# Altium PCB 555振荡器_qft.PCBDOC
Units mm, origin at the board's own origin, x right, y up, seen from the top; angles counter-clockwise.
Board outline 152.4 x 101.6 mm, 2 copper layers (Top Layer, Bottom Layer); 6 components, 6 nets, 24 pads, 1 vias.
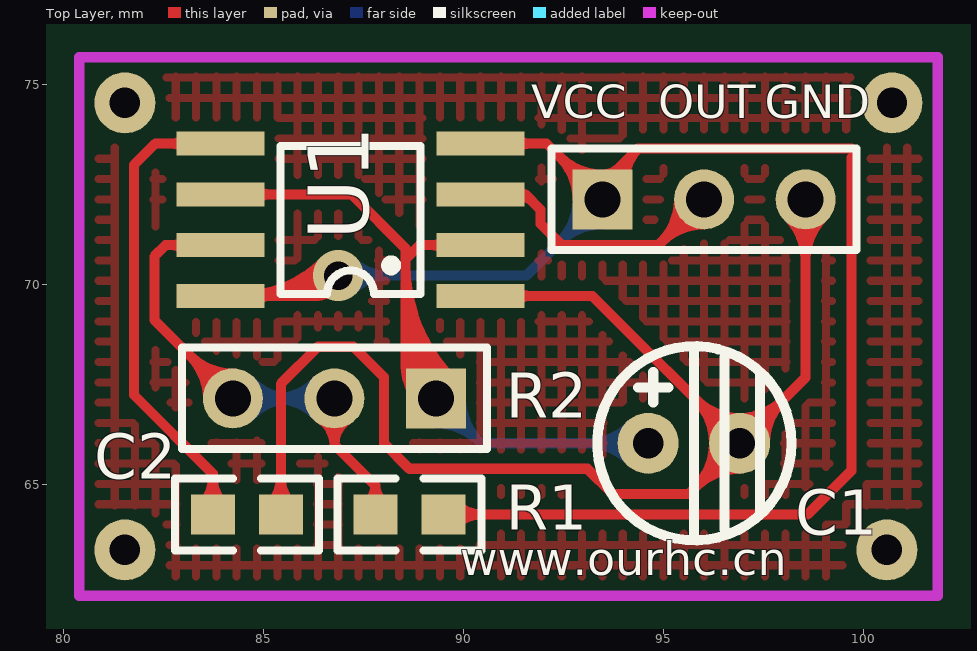
[diagram p0: Top Layer view]
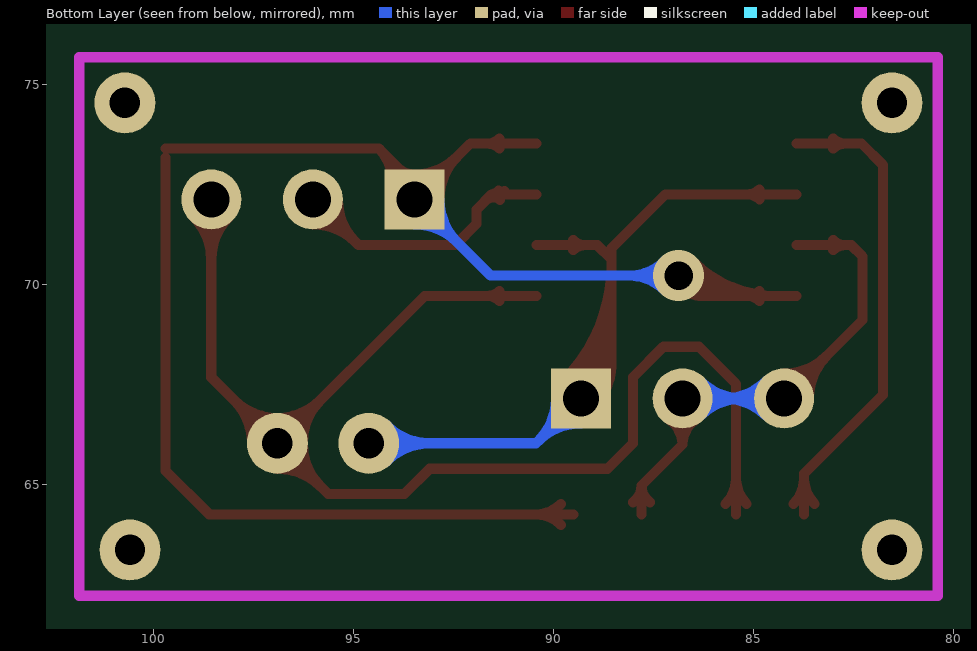
[diagram p1: Bottom Layer view, seen from below]

## Layer stack, top to bottom
Top Layer: signal copper 0.0356
Dielectric: dielectric 0.32, FR-4, Dk 4.8
Bottom Layer: signal copper 0.0356

## Board outline
25.4,25.4 177.8,25.4 177.8,127 25.4,127

## Design rules (kind name [scope] priority, off if disabled: settings)
Clearance [All] p1: gap=0.254
ComponentClearance [All] p1: gap=0.254 collisioncheckmode=3 verticalgap=0.254
PolygonConnect [All] p1: connectstyle=Relief reliefconductorwidth=0.254 reliefentries=4 polygonreliefangle="90 Angle"
RoutingVias [All] p1: holewidth=0.711 width=1.27 viastyle="Through Hole" minholewidth=0.711 minwidth=1.27 maxholewidth=0.711 maxwidth=1.27
SolderMaskExpansion [All] p1: expansion=0.102
TestPointUsage [All] p1: valid=0 allowmultiple=FALSE
Testpoint [All] p1: side=15 testpointundercomponent=TRUE minsize=1.016 maxsize=2.54 preferedsize=1.524 minholesize=0 maxholesize=1.016 preferedholesize=0.813 testpointgrid=0.025 style=1023 order=0-112345678
Width [All] p1: maxlimit=0.254 minlimit=0.254 preferedwidth=0.254
17 further rules are at their usual default settings.

## Classes and differential pairs
component class 555振荡器: C1

## Components (designator, comment, footprint, x,y, rotation, side; value= is the part's Value field where it differs from the comment)
C1 "" C-DJ-4 97.028,63.5 r0 top
C2 "C2" C1608-0603 84.582,64.262 r0 top
JP1 "" HDR1X3 93.472,72.136 r0 top
R1 "" C1608-0603 88.646,64.262 r0 top
R2 "" HDR-3 83.058,68.326 r180 top
U1 "NE555D" CDFP-8 90.932,74.168 r90 top

## Footprints (in the part's own frame and the unit in brackets; to place one, negate y for a bottom-side part, rotate by r counter-clockwise, add the part's x,y. Pads: shape width x height; smd on the part's side, far side on the other; paste and mask are expansions set on the pad)
C1608-0603 [mm] "Chip Resistor; Body 1.6 x 0.8 mm (LxW typ)"
  rect 1.1x1 smd: 1(-0.85,0) 2(0.85,0)
  silkscreen extent -1.8,-0.9 1.8,0.9
C-DJ-4 [mil]
  round 60 hole 30: 1(-95,100) 2(-5,100)
  silkscreen extent -145,5 46,195
CDFP-8 [mm]
  rect 0.6x2.2 smd: 1(-4.445,0.508) 2(-3.175,0.508) 3(-1.905,0.508) 4(-0.635,0.508) 5(-0.635,7.008) 6(-1.905,7.008) 7(-3.175,7.008) 8(-4.445,7.008)
  silkscreen extent -4.39,2.01 -0.69,5.51
HDR1X3 [mm] "Connector; Header; 3 Position"
  rect 1.5x1.5 hole 0.9: 1(0,0)
  round 1.5 hole 0.9: 2(2.54,0) 3(5.08,0)
  silkscreen extent -1.27,-1.27 6.35,1.27
HDR-3 [mm]
  rect 1.5x1.5 hole 0.9: 1(-6.253,1.165)
  round 1.5 hole 0.9: 2(-3.713,1.165) 3(-1.173,1.165)
  silkscreen extent -7.52,-0.11 0.1,2.43

## Part data
C1: library part "Cap Pol1", "Polarized Capacitor (Radial)"
C2: library part "Cap Semi", "Capacitor (Semiconductor SIM Model)"
JP1: library part "Header 3", "Header, 3-Pin"
R1: library part Res3, "Resistor"
R2: library part RPot, "Potentiometer"
U1: "Precision Timer"

## Free pads (board coordinates)
  round 1.524 hole 0.762: 0(100.711,74.549) 1(81.534,74.549) 2(81.534,63.373) 3(100.584,63.373)

## Via types
v1: diameter 1.27, hole 0.711, Top Layer to Bottom Layer, 1 vias

## Nets (pads, with @x,y where several pads share a name; then routed paths per layer and width w, separated by ;. In a path a pad name is that pad's centre, name@x,y a point inside that pad or via, vN(x,y) a via of type N, cw(c..) or ccw(c..) an arc to the next point about the centre after c; other vN are vias at no path point)
GND: C1.2 C2.2 JP1.3 U1.1 | length 50.3
  Top Layer w0.254: C2.2@85.168,64.526 ccw(c84.531,65.162) 85.432,65.162 ccw(c86.332,65.162) C2.2@85.696,64.526 ; C2.2 85.432,67.525 86.36,68.453 87.249,68.453 88.011,67.691 88.011,66.04 88.646,65.405 93.091,65.405 93.726,64.77 95.631,64.77 C1.2 ; U1.1 93.218,69.723 C1.2 ; U1.1@91.346,69.601 cw(c91.642,69.305) 91.642,69.723 cw(c91.642,70.141) U1.1@91.346,69.845 ; C1.2@96.901,65.405 ccw(c96.901,63.872) 95.817,64.956 ccw(c94.733,66.04) 96.266,66.04 ccw(c94.733,66.04) 95.817,67.124 ccw(c96.901,68.208) 96.901,66.675 ccw(c96.901,68.208) 97.985,67.124 ccw(c99.069,66.04) C1.2@97.536,66.04 ; C1.2@96.901,65.659 ccw(c96.901,64.739) 96.251,65.39 ccw(c95.6,66.04) 96.52,66.04 ccw(c95.6,66.04) 96.251,66.69 ccw(c96.901,67.341) 96.901,66.421 ccw(c96.901,67.341) 97.551,66.69 ccw(c98.202,66.04) C1.2@97.282,66.04 ; JP1.3@98.111,71.695 cw(c97.048,70.632) 98.552,70.632 cw(c100.056,70.632) JP1.3@98.993,71.695 ; JP1.3@98.291,71.875 cw(c97.661,71.245) 98.552,71.245 cw(c99.443,71.245) JP1.3@98.813,71.875 ; JP1.3 98.552,67.691 C1.2
NetC1_1: C1.1 R2.1 U1.2 U1.6 | length 38.7
  Top Layer w0.254: U1.6 87.198,72.263 88.544,70.917 88.544,70.637 ; U1.6@84.846,72.141 cw(c85.142,71.845) 85.142,72.263 cw(c85.142,72.681) U1.6@84.846,72.385 ; 88.544,68.063 ccw(c90.213,68.063) R2.1@89.033,66.883 ; 88.544,68.676 ccw(c90.826,68.676) R2.1@89.213,67.063 ; 88.544,69.289 ccw(c91.439,69.289) R2.1@89.392,67.242 ; 88.544,69.903 ccw(c92.053,69.903) R2.1@89.572,67.422 ; 88.544,70.516 ccw(c92.666,70.516) R2.1@89.752,67.602 ; R2.1@88.709,67.32 ccw(c88.098,67.481) 88.544,67.928 ; R2.1@89.152,67.763 cw(c88.991,68.374) 88.544,67.928 ; R2.1 88.544,67.928 ; U1.2@89.502,70.871 ccw(c89.206,70.575) 89.206,70.993 ccw(c89.206,71.411) U1.2@89.502,71.115 ; U1.2 88.9,70.993 88.544,70.637 ; 88.544,67.928 88.544,70.637
  Bottom Layer w0.254: R2.1@89.311,66.538 cw(c89.311,65.034) 90.375,66.097 cw(c91.438,67.161) R2.1@89.934,67.161 ; R2.1@89.311,66.792 cw(c89.311,65.901) 89.941,66.531 cw(c90.571,67.161) R2.1@89.68,67.161 ; R2.1 90.432,66.04 C1.1 ; C1.1@94.166,65.591 ccw(c93.082,64.507) 93.082,66.04 ccw(c93.082,67.573) C1.1@94.166,66.489 ; C1.1@94.346,65.771 ccw(c93.695,65.12) 93.695,66.04 ccw(c93.695,66.96) C1.1@94.346,66.309
NetC2_1: C2.1 U1.5 | length 14
  Top Layer w0.254: U1.5@83.002,73.411 ccw(c82.706,73.115) 82.706,73.533 ccw(c82.706,73.951) U1.5@83.002,73.655 ; C2.1@83.468,64.526 ccw(c82.832,65.162) 83.732,65.162 ccw(c84.633,65.162) C2.1@83.996,64.526 ; C2.1 83.732,65.278 81.763,67.247 81.763,73 82.296,73.533 U1.5
NetJP1_2: JP1.2 U1.3 | length 11.8
  Top Layer w0.254: U1.3 91.542,72.263 ; U1.3@91.224,72.344 cw(c91.224,71.773) 91.628,72.177 ; U1.3@91.331,72.127 cw(c91.503,71.907) 91.7,72.104 ; U1.3@91.369,72.169 cw(c91.542,72.058) 91.542,72.263 ; U1.3@91.369,72.357 ccw(c91.542,72.468) 91.542,72.263 ; JP1.2@95.389,72.136 cw(c93.885,72.136) 94.948,71.072 cw(c96.012,70.009) JP1.2@96.012,71.513 ; JP1.2@95.643,72.136 cw(c94.752,72.136) 95.382,71.506 cw(c96.012,70.876) JP1.2@96.012,71.767 ; JP1.2 94.869,70.993 92.456,70.993 91.923,71.526 91.923,71.882 91.542,72.263
NetR1_1: R1.1 R2.2 R2.3 U1.7 | length 26.4
  Top Layer w0.254: U1.7@83.002,70.871 ccw(c82.706,70.575) 82.706,70.993 ccw(c82.706,71.411) U1.7@83.002,71.115 ; R2.3@83.608,67.161 ccw(c82.104,67.161) 83.167,68.225 ccw(c84.231,69.288) R2.3@84.231,67.784 ; R2.3@83.862,67.161 ccw(c82.971,67.161) 83.601,67.791 ccw(c84.231,68.421) R2.3@84.231,67.53 ; U1.7 82.55,70.993 82.271,70.714 82.271,69.121 R2.3 ; R2.2@86.43,66.639 cw(c86.019,66.01) 86.771,66.01 ; R2.2 86.771,66.01 ; R2.2@87.112,66.639 ccw(c87.523,66.01) 86.771,66.01 ; R1.1@87.58,64.566 ccw(c87.282,64.985) 87.796,64.985 ; R1.1 87.796,64.985 ; R1.1@88.012,64.566 cw(c88.31,64.985) 87.796,64.985 ; 86.771,66.01 87.796,64.985
  Bottom Layer w0.254: R2.3 R2.2 ; R2.3@84.492,66.9 cw(c85.122,66.27) 85.122,67.161 cw(c85.122,68.052) R2.3@84.492,67.422 ; R2.3@84.672,66.72 cw(c85.735,65.657) 85.735,67.161 cw(c85.735,68.665) R2.3@84.672,67.602 ; R2.2@86.33,66.72 ccw(c85.267,65.657) 85.267,67.161 ccw(c85.267,68.665) R2.2@86.33,67.602 ; R2.2@86.51,66.9 ccw(c85.88,66.27) 85.88,67.161 ccw(c85.88,68.052) R2.2@86.51,67.422
VCC: JP1.1 R1.2 U1.4 U1.8 | length 61.4
  Top Layer w0.254: U1.8 86.36,69.723 ; U1.8@84.415,69.723 ccw(c84.415,72.684) v1@86.509,70.59 ; U1.8@84.846,69.601 cw(c85.142,69.305) 85.142,69.723 cw(c85.142,70.141) U1.8@84.846,69.845 ; 85.028,69.723 ccw(c85.028,72.071) v1@86.688,70.411 ; 85.642,69.723 ccw(c85.642,71.457) v1(86.868,70.231) 86.36,69.723 ; 86.255,69.723 ccw(c86.255,70.844) v1@87.048,70.051 ; v1@86.41,70.012 cw(c86.18,69.903) 86.36,69.723 ; v1@86.649,69.773 ccw(c86.54,69.543) 86.36,69.723 ; R1.2 98.603,64.262 99.695,65.354 99.695,73.177 ; R1.2@89.81,63.998 cw(c90.446,63.362) 90.446,64.262 cw(c90.446,65.162) R1.2@89.81,64.526 ; U1.4 92.075,73.533 JP1.1 93.472,72.517 94.361,73.406 ; U1.4@91.346,73.411 cw(c91.642,73.115) 91.642,73.533 cw(c91.642,73.951) U1.4@91.346,73.655 ; JP1.1@92.849,72.136 ccw(c91.345,72.136) 92.408,73.2 ccw(c93.472,74.263) 93.472,72.759 ccw(c93.472,73.343) 93.885,72.93 ; JP1.1@93.103,72.136 ccw(c92.212,72.136) 92.842,72.766 ccw(c93.472,73.396) JP1.1@93.472,72.505 ; JP1.1@93.827,72.235 cw(c94.679,72.473) 94.054,73.099 ; JP1.1@94.072,72.304 cw(c95.159,72.608) 94.361,73.406 ; 99.695,73.406 94.361,73.406
  Bottom Layer w0.254: v1(86.868,70.231) 91.567,70.231 JP1.1 ; v1@87.227,69.872 cw(c88.094,69.005) 88.094,70.231 cw(c88.094,71.457) v1@87.227,70.59 ; JP1.1@92.849,72.136 cw(c91.345,72.136) 92.408,71.072 cw(c93.472,70.009) JP1.1@93.472,71.513 ; JP1.1@93.103,72.136 cw(c92.212,72.136) 92.842,71.506 cw(c93.472,70.876) JP1.1@93.472,71.767

## Polygon pours and split planes (outlines as drawn)
no net on Top Layer (hatched 90Degree grid 0.508 track 0.203): 80.736,75.311 101.437,75.311 101.437,62.611 80.736,62.611

## Keep-outs
Keep-Out Layer:
  lines w0.254: 80.391,62.23 80.391,75.692 101.854,75.692 101.854,62.23 80.391,62.23

## Silkscreen, mask and mechanical layers (free items; w line width, h text height)
Top Overlay:
  text "VCC" at 91.694,74.168 h0.84
  text "OUT" at 94.869,74.168 h0.84
  text "GND" at 97.536,74.168 h0.84
  text "www.ourhc.cn" at 89.916,62.738 h0.84